# Altium PCB iTOP4412_convertor_4.3Clasics_v1_5.PcbDoc (part 2 of 2)
Units mil, origin at the board's own origin, x right, y up, seen from the top; angles counter-clockwise.
Board outline 4346 x 3286 mil, 2 copper layers (TOP, BOTTOM), stack 10.4 mil thick; 67 components, 78 nets, 328 pads, 290 vias.
Unrouted connection lines stored in the file: 26.
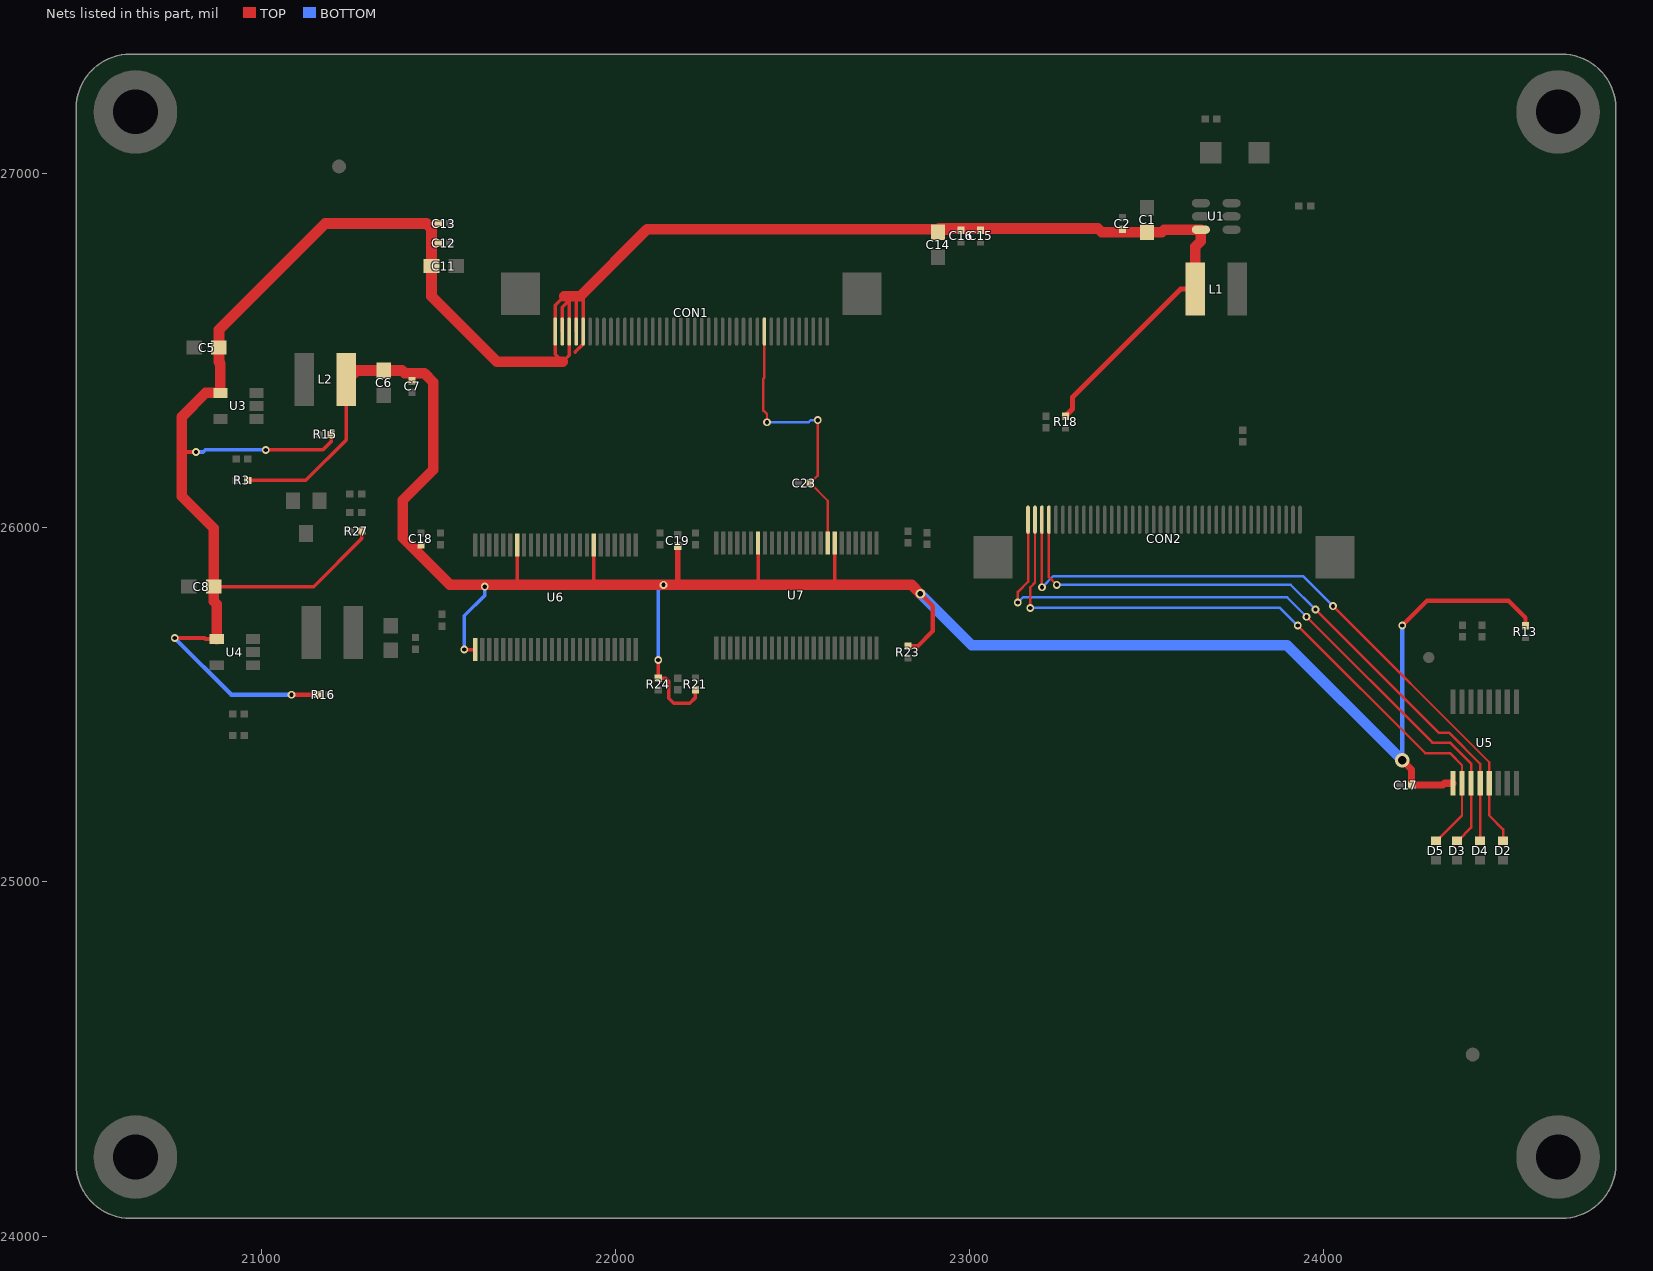
[diagram p2: the nets of this part, all layers, seen from the top]

## Via types
v1: diameter 28, hole 16, TOP to BOTTOM, 182 vias
v2: diameter 22, hole 12, TOP to BOTTOM, 105 vias
v3: diameter 40, hole 24, TOP to BOTTOM, 3 vias

## Nets (pads, with @x,y where several pads share a name; then routed paths per layer and width w, separated by ;. In a path a pad name is that pad's centre, name@x,y a point inside that pad or via, vN(x,y) a via of type N, cw(c..) or ccw(c..) an arc to the next point about the centre after c; other vN are vias at no path point) (continued)
VDD18: C6.2 C7.2 C17.1 C18.1 C19.1 L2.2 R3.1 R13.2 R21.2 R23.2 R24.2 U5.1 U6.1 U6.31 U6.42 U7.31 U7.42 | length 6851.6
  TOP w10: R3.1@20962.58,26133.41 21126.08,26133.41 21240.14,26247.46 L2.2@21240.14,26418.41 ; 21419.08,26435.41 21426.08,26428.41 C7.2@21426.08,26414.91 ; 21439.09,25932.4 21451.08,25944.38 C18.1@21451.08,25951.91 ; v2(21573.44,25655.76) U6.1@21604.7,25655.76 ; v2(21631.08,25833.41) v2@21631.08,25838.41 ; U6.42@21722.81,25951.05 21722.81,25841.68 21726.08,25838.41 ; 21936.08,25838.41 21939.35,25841.68 U6.31@21939.35,25951.05 ; v2(22121.08,25626.41) R24.2@22121.08,25574.91 22142.08,25574.91 22151.08,25565.91 22151.08,25518.41 22165.08,25504.41 22210.08,25504.41 22226.08,25520.41 R21.2@22226.08,25541.91 ; 22396.08,25838.41 22402.81,25845.13 U7.42@22402.81,25956.05 ; 22616.08,25838.41 22619.35,25841.68 U7.31@22619.35,25956.05
  TOP w12: R23.2@22826.08,25664.91 22852.58,25664.91 22896.08,25708.41 22896.08,25778.41 v1(22861.08,25813.41) ; v2(24221.08,25723.41) 24291.08,25793.41 24521.08,25793.41 24569.08,25745.41 R13.2@24569.08,25722.91
  TOP w15: C19.1@22176.08,25946.91 22176.08,25843.41 22181.08,25838.41
  TOP w20: v3(24221.08,25343.41) 24247.58,25316.91 C17.1@24247.58,25273.41 24335.78,25273.41 24340.78,25278.41 U5.1@24364.28,25278.41
  TOP w30: L2.2@21240.14,26418.41 21250.14,26428.41 21256.08,26428.41 21271.08,26443.41 C6.2@21346.08,26443.41 21397.58,26443.41 21405.58,26435.41 21419.08,26435.41 21461.08,26435.41 21486.08,26410.41 21486.08,26163.41 21400.08,26077.41 21400.08,25971.41 21439.09,25932.4 21533.08,25838.41 21631.08,25838.41 21726.08,25838.41 21936.08,25838.41 v2(22136.08,25838.41) 22181.08,25838.41 22396.08,25838.41 22616.08,25838.41 22836.08,25838.41 v1(22861.08,25813.41)
  BOTTOM w10: v2(21573.44,25655.76) 21573.44,25750.76 21631.08,25808.41 v2(21631.08,25833.41) ; v2(22121.08,25626.41) 22121.08,25813.41 22121.23,25813.56 22121.23,25823.56 v2(22136.08,25838.41)
  BOTTOM w12: v3(24221.08,25343.41) v2(24221.08,25723.41)
  BOTTOM w30: v1(22861.08,25813.41) 23006.08,25668.41 23896.08,25668.41 v3(24221.08,25343.41)
VSYS: C1.1 C2.2 C5.2 C8.2 C11.1 C12.1 C13.1 C14.1 C15.1 C16.1 CON1.1 CON1.2 CON1.3 CON1.4 CON1.5 L1.1 R15.2 R16.2 R18.2 R27.1 U1.6 U3.4 U4.4 | length 7444.3
  TOP w10: 20776.08,26208.41 20781.08,26213.41 v2(20816.08,26213.41) ; C8.2@20866.08,25833.41 21148.58,25833.41 21284.58,25969.41 R27.1@21284.58,25990.41 ; v2(21013.08,26219.41) 21174.58,26219.41 21197.58,26242.41 R15.2@21197.58,26263.41 ; 21481.08,26802.41 21482.08,26803.41 C12.1@21499.58,26803.41 ; 21481.08,26844.41 21495.08,26858.41 C13.1@21499.58,26858.41 ; CON1.2@21849.91,26553.41 21849.91,26622.23 21869.59,26641.92 ; 21856.08,26653.41 21830.22,26627.55 CON1.1@21830.22,26553.41 21830.22,26489.26 21851.08,26468.41 21869.59,26486.92 CON1.3@21869.59,26553.41 21869.59,26641.92 ; 21881.08,26653.41 21869.59,26641.92 ; 21887.08,26494.41 21887.08,26496.52 21908.96,26518.41 CON1.5@21908.96,26553.41 21908.96,26645.52 21901.08,26653.41 21889.28,26641.6 CON1.4@21889.28,26553.41 ; C2.2@23431.08,26833.41 C2.2@23431.08,26841.91
  TOP w12: v2(20756.08,25688.41) 20840.08,25688.41 20843.08,25685.41 U4.4@20875.08,25685.41 ; v2(21086.08,25528.41) R16.2@21159.58,25528.41
  TOP w15: C14.1@22911.08,26841.91 C14.1@22911.08,26833.41 22944.58,26833.41 22951.08,26839.91 C16.1@22976.08,26839.91 C15.1@23031.08,26839.91 ; R18.2@23271.08,26314.91 23271.08,26315.41 23290.63,26334.95 23290.63,26368.07 23595.97,26673.41 L1.1@23637.03,26673.41
  TOP w30: U4.4@20875.08,25685.41 20875.08,25783.41 20866.08,25792.41 C8.2@20866.08,25833.41 20866.08,25998.41 20776.08,26088.41 20776.08,26208.41 20776.08,26312.41 20844.08,26380.41 U3.4@20885.08,26380.41 20885.08,26463.41 20881.08,26467.41 C5.2@20881.08,26508.41 20881.08,26558.41 21181.08,26858.41 21467.08,26858.41 21481.08,26844.41 21481.08,26802.41 C11.1@21481.08,26738.41 21481.08,26653.41 21666.08,26468.41 21851.08,26468.41 ; 21856.08,26653.41 21881.08,26653.41 21901.08,26653.41 22089.58,26841.91 22911.08,26841.91 22913.58,26844.41 23361.58,26844.41 23372.58,26833.41 23431.08,26833.41 C1.1@23501.08,26833.41 23542.08,26833.41 23549.68,26841.01 U1.6@23652.78,26841.01 23652.78,26808.19 23637.03,26792.44 L1.1@23637.03,26673.41
  BOTTOM w10: v2(20816.08,26213.41) 20837.08,26213.41 20843.08,26219.41 v2(21013.08,26219.41)
  BOTTOM w12: v2(20756.08,25688.41) 20916.08,25528.41 v2(21086.08,25528.41)
XM: CON2.37 D4.2 U5.4 | length 1814.8
  TOP w7: CON2.37@23223.92,26022.41 23223.92,25860.57 v2(23246.08,25838.41) ; v2(23976.08,25768.91) 24323.58,25421.41 24353.08,25421.41 24441.08,25333.41 U5.4@24441.08,25278.41 D4.2@24441.08,25115.97
  BOTTOM w7: v2(23246.08,25838.41) 23906.58,25838.41 v2(23976.08,25768.91)
XP: CON2.39 D5.2 U5.2 | length 1902.3
  TOP w7: v2(23171.08,25773.41) 23171.08,25831.41 23184.55,25844.88 CON2.39@23184.55,26022.41 ; v2(23926.08,25723.41) 24286.08,25363.41 24355.58,25363.41 24389.88,25329.11 U5.2@24389.88,25278.41 24389.88,25187.8 24318.05,25115.97 D5.2@24316.08,25115.97
  BOTTOM w7: v2(23171.08,25773.41) 23876.08,25773.41 v2(23926.08,25723.41)
XPWMTOUT1: C23.2 CON1.31 U7.32 | length 783.8
  TOP w7: CON1.31@22420.78,26553.41 22420.78,26423.1 22418.08,26420.41 22418.08,26330.4 22428.08,26320.4 v2(22428.08,26297.41) ; C23.2@22549.58,26125.41 C23.2@22550.08,26125.41 ; v2(22571.08,26303.41) 22571.08,26146.41 C23.2@22550.08,26125.41 ; U7.32@22599.66,25956.05 22599.66,26075.83 C23.2@22550.08,26125.41
  BOTTOM w7: v2(22428.08,26297.41) 22545.58,26297.41 22551.58,26303.41 v2(22571.08,26303.41)
YM: CON2.38 D2.2 U5.5 | length 1922.8
  TOP w7: v2(23204.08,25831.41) 23204.08,25850.91 23204.24,25851.06 CON2.38@23204.24,26022.41 ; v2(24026.08,25778.41) 24466.68,25337.81 U5.5@24466.68,25278.41 24466.68,25187.81 24506.08,25148.41 D2.2@24506.08,25115.97
  BOTTOM w7: v2(23204.08,25831.41) 23236.08,25863.41 23941.08,25863.41 v2(24026.08,25778.41)
YP: CON2.40 D3.2 U5.3 | length 1961.5
  TOP w7: v2(23136.08,25788.41) 23136.08,25818.41 23164.87,25847.19 CON2.40@23164.87,26022.41 ; v2(23951.08,25748.41) 24306.08,25393.41 24356.08,25393.41 24415.48,25334 U5.3@24415.48,25278.41 24415.48,25153.4 24378.05,25115.97 D3.2@24376.08,25115.97
  BOTTOM w7: v2(23136.08,25788.41) 23151.08,25803.41 23896.08,25803.41 v2(23951.08,25748.41)
pads on no net: U5.7 U5.8 U5.9 U5.15 U7.2 U7.5 U7.6 U7.8 U7.9 U7.11 U7.12 U7.13 U7.14 U7.16 U7.33 U7.35 U7.36 U7.37 U7.38 U7.40 U7.41 U7.43 U7.44 U7.47

## Polygon pours and split planes (outlines as drawn)
N362187 on TOP "TOP-N362187" (solid, pour order 2): 21 vertices, not listed, extent 21240.08,26041.53 21261.08,26062.9
N362187 on TOP "TOP-N362187 1" (solid, pour order 4): 21 vertices, not listed, extent 21240.08,26073.91 21261.08,26095.28
N362187 on TOP "TOP-N362187 2" (solid, pour order 6): 21 vertices, not listed, extent 21230.09,26084.41 21251.46,26104.41
N362187 on TOP "TOP-N362187 3" (solid, pour order 8): 24 vertices, not listed, extent 21163.71,26052.03 21207.89,26099.28
VDD18 on TOP "TOP-VDD18" (solid, pour order 10): 29 vertices, not listed, extent 21436.08,25929.38 21461.08,25962.41
VDD18 on TOP "TOP-VDD18 1" (solid, pour order 12): 21424.65,26433.19 21416.08,26425.41 21426.08,26413.66 21436.08,26425.41 21427.52,26433.19 21427.1,26433.3 21426.67,26433.37 21426.23,26433.4 21425.79,26433.4 21425.36,26433.35 21424.93,26433.27 21424.65,26433.19
VDD18 on TOP "TOP-VDD18 2" (solid, pour order 14): 18 vertices, not listed, extent 22216.08,25521.41 22236.08,25543.16
VDD18 on TOP "TOP-VDD18 3" (solid, pour order 16): 22177.9,25926.63 22186.08,25936.41 22176.08,25948.78 22166.08,25936.41 22174.26,25926.63 22174.9,25926.5 22175.56,25926.43 22176.21,25926.41 22176.86,25926.45 22177.51,25926.54 22177.9,25926.63
VDD18 on TOP "TOP-VDD18 4" (solid, pour order 18): 21940.17,25912.62 21945.35,25918.55 21939.35,25952.3 21933.35,25918.55 21938.53,25912.62 21938.97,25912.56 21939.4,25912.55 21939.84,25912.57 21940.17,25912.62
VDD18 on TOP "TOP-VDD18 5" (solid, pour order 20): 21723.63,25912.62 21728.81,25918.55 21722.81,25952.3 21716.81,25918.55 21721.99,25912.62 21722.42,25912.56 21722.86,25912.55 21723.29,25912.57 21723.63,25912.62
VDD18 on TOP "TOP-VDD18 6" (solid, pour order 22): 18 vertices, not listed, extent 20961.33,26123.41 20983.08,26143.41
VDD18 on TOP "TOP-VDD18 7" (solid, pour order 24): 23 vertices, not listed, extent 21568.7,25623.69 21605.95,25687.84
VDD18 on TOP "TOP-VDD18 8" (solid, pour order 26): 19 vertices, not listed, extent 22119.83,25564.41 22141.58,25585.41
VDD18 on TOP "TOP-VDD18 9" (solid, pour order 28): 18 vertices, not listed, extent 22111.08,25573.66 22131.08,25595.4
VDD18 on TOP "TOP-VDD18 10" (solid, pour order 30): 17 vertices, not listed, extent 22824.58,25654.41 22846.58,25675.41
VDD18 on TOP "TOP-VDD18 11" (solid, pour order 32): 22403.63,25917.62 22408.81,25923.55 22402.81,25957.3 22396.81,25923.55 22401.99,25917.62 22402.42,25917.56 22402.86,25917.55 22403.29,25917.57 22403.63,25917.62
VDD18 on TOP "TOP-VDD18 12" (solid, pour order 34): 22620.17,25917.62 22625.35,25923.55 22619.35,25957.3 22613.35,25923.55 22618.53,25917.62 22618.97,25917.56 22619.4,25917.55 22619.84,25917.57 22620.17,25917.62
VDD18 on TOP "TOP-VDD18 13" (solid, pour order 36): 24566.85,25742.98 24559.08,25733.41 24569.08,25721.41 24579.08,25733.41 24571.31,25742.98 24570.82,25743.15 24570.31,25743.28 24569.79,25743.36 24569.27,25743.4 24568.75,25743.4 24568.23,25743.34 24567.71,25743.25 24567.21,25743.1 24566.85,25742.98
MD_RSTN on TOP "TOP-MD_RSTN" (solid, pour order 38): 17 vertices, not listed, extent 22318.07,25955.17 22330.07,25994.54
XPWMTOUT1 on TOP "TOP-XPWMTOUT1" (solid, pour order 40): 17 vertices, not listed, extent 22593.66,25955.17 22605.66,25994.54
LCD_HSYNC on TOP "TOP-LCD_HSYNC" (solid, pour order 42): 17 vertices, not listed, extent 22633.03,25955.17 22645.03,25994.54
N338650 on TOP "TOP-N338650" (solid, pour order 44): 23 vertices, not listed, extent 22056.21,25918.98 22093.46,25983.12
N338650 on TOP "TOP-N338650 1" (solid, pour order 46): 19 vertices, not listed, extent 22105.59,25941.41 22127.33,25962.41
LCD_VD5 on TOP "TOP-LCD_VD5" (solid, pour order 48): 17 vertices, not listed, extent 21677.44,25950.17 21689.44,25989.54
N338394 on TOP "TOP-N338394" (solid, pour order 54): 23 vertices, not listed, extent 22248.7,25923.98 22285.95,25988.12
N338394 on TOP "TOP-N338394 1" (solid, pour order 56): 19 vertices, not listed, extent 22224.83,25941.41 22246.58,25962.41
N337628 on TOP "TOP-N337628" (solid, pour order 58): 22805.87,25954.85 22816.08,25946.41 22827.96,25956.91 22816.08,25967.41 22805.87,25958.97 22805.72,25958.33 22805.62,25957.68 22805.58,25957.03 22805.6,25956.38 22805.68,25955.73 22805.81,25955.08 22805.87,25954.85
N338646 on TOP "TOP-N338646" (solid, pour order 60): 23 vertices, not listed, extent 21568.7,25918.98 21605.95,25983.12
N338646 on TOP "TOP-N338646 1" (solid, pour order 62): 19 vertices, not listed, extent 21504.83,25941.41 21526.58,25962.41
LCD_VOTCLK on TOP "TOP-LCD_VOTCLK" (solid, pour order 64): 17 vertices, not listed, extent 22652.72,25955.17 22664.72,25994.54
LCD_VD21 on TOP "TOP-LCD_VD21" (solid, pour order 66): 17 vertices, not listed, extent 21972.72,25950.17 21984.72,25989.54
LCD_VD12 on TOP "TOP-LCD_VD12" (solid, pour order 68): 17 vertices, not listed, extent 21815.24,25950.17 21827.24,25989.54
LCD_VD19 on TOP "TOP-LCD_VD19" (solid, pour order 70): 17 vertices, not listed, extent 21913.66,25950.17 21925.66,25989.54
LCD_VD4 on TOP "TOP-LCD_VD4" (solid, pour order 72): 17 vertices, not listed, extent 21638.07,25950.17 21650.07,25989.54
LCD_VD11 on TOP "TOP-LCD_VD11" (solid, pour order 74): 17 vertices, not listed, extent 21795.55,25950.17 21807.55,25989.54
N337734 on TOP "TOP-N337734" (solid, pour order 78): 22285.52,25622.33 22290.7,25628.26 22284.7,25662.01 22278.7,25628.26 22283.88,25622.33 22284.31,25622.28 22284.75,25622.27 22285.18,25622.29 22285.52,25622.33
LCD_VD20 on TOP "TOP-LCD_VD20" (solid, pour order 80): 17 vertices, not listed, extent 21953.03,25950.17 21965.03,25989.54
LCD_VD15 on TOP "TOP-LCD_VD15" (solid, pour order 82): 17 vertices, not listed, extent 21893.98,25950.17 21905.98,25989.54
LCD_VD22 on TOP "TOP-LCD_VD22" (solid, pour order 84): 17 vertices, not listed, extent 22012.09,25950.17 22024.09,25989.54
LCD_VD3 on TOP "TOP-LCD_VD3" (solid, pour order 86): 17 vertices, not listed, extent 21618.39,25950.17 21630.39,25989.54
LCD_VD10 on TOP "TOP-LCD_VD10" (solid, pour order 88): 17 vertices, not listed, extent 21756.18,25950.17 21768.18,25989.54
LCD_VD6 on TOP "TOP-LCD_VD6" (solid, pour order 90): 17 vertices, not listed, extent 21697.13,25950.17 21709.13,25989.54
N337730 on TOP "TOP-N337730" (solid, pour order 94): 17 vertices, not listed, extent 22805.59,25621.41 22827.58,25642.41
LCD_VD23 on TOP "TOP-LCD_VD23" (solid, pour order 96): 17 vertices, not listed, extent 22031.77,25950.17 22043.77,25989.54
LCD_VD14 on TOP "TOP-LCD_VD14" (solid, pour order 98): 17 vertices, not listed, extent 21854.61,25950.17 21866.61,25989.54
LCD_VD13 on TOP "TOP-LCD_VD13" (solid, pour order 100): 17 vertices, not listed, extent 21834.92,25950.17 21846.92,25989.54
N338218 on TOP "TOP-N338218" (solid, pour order 104): 19 vertices, not listed, extent 22100.59,25531.41 22122.33,25552.41
N338218 on TOP "TOP-N338218 1" (solid, pour order 106): 22058.28,25617.33 22063.46,25623.26 22057.46,25657.01 22051.46,25623.26 22056.64,25617.33 22057.08,25617.28 22057.51,25617.27 22057.95,25617.29 22058.28,25617.33
LCD_VD7 on TOP "TOP-LCD_VD7" (solid, pour order 108): 17 vertices, not listed, extent 21736.5,25950.17 21748.5,25989.54
LCD_DEN on TOP "TOP-LCD_DEN" (solid, pour order 110): 17 vertices, not listed, extent 22711.77,25955.17 22723.77,25994.54
LCD_VSYNC on TOP "TOP-LCD_VSYNC" (solid, pour order 112): 17 vertices, not listed, extent 22692.09,25955.17 22704.09,25994.54
CAM5M_RST on TOP "TOP-CAM5M_RST" (solid, pour order 114): 21 vertices, not listed, extent 21282.71,26032.41 21304.08,26052.41
N334265 on TOP "TOP-N334265" (solid, pour order 116): 21 vertices, not listed, extent 23261.08,26261.41 23281.08,26282.78
N332264 on TOP "TOP-N332264" (solid, pour order 118): 21 vertices, not listed, extent 23761.08,26221.41 23781.08,26242.78
N322804 on TOP "TOP-N322804" (solid, pour order 120): 21 vertices, not listed, extent 20855.08,25577.41 20895.08,25612.91
N322804 on TOP "TOP-N322804 1" (solid, pour order 122): 17 vertices, not listed, extent 20909.08,25411.91 20930.08,25433.9
N322804 on TOP "TOP-N322804 2" (solid, pour order 124): 17 vertices, not listed, extent 20909.08,25452.91 20930.08,25474.91
N322804 on TOP "TOP-N322804 3" (solid, pour order 126): 17 vertices, not listed, extent 20909.08,25471.91 20930.08,25493.9
N321888 on TOP "TOP-N321888" (solid, pour order 128): 19 vertices, not listed, extent 20919.08,26132.16 20940.08,26153.9
N321888 on TOP "TOP-N321888 1" (solid, pour order 130): 19 vertices, not listed, extent 20919.08,26172.91 20940.08,26194.66
N321888 on TOP "TOP-N321888 2" (solid, pour order 132): 19 vertices, not listed, extent 20919.08,26192.16 20940.08,26213.9
XM on TOP "TOP-XM" (solid, pour order 134): 22 vertices, not listed, extent 24427.11,25115.09 24455.06,25141.95
XM on TOP "TOP-XM 1" (solid, pour order 136): 19 vertices, not listed, extent 24433.58,25235.91 24448.58,25279.28
XM on TOP "TOP-XM 2" (solid, pour order 138): 19 vertices, not listed, extent 24433.58,25277.53 24448.58,25320.9
YP on TOP "TOP-YP" (solid, pour order 140): 19 vertices, not listed, extent 24407.98,25235.91 24422.98,25279.28
YP on TOP "TOP-YP 1" (solid, pour order 142): 19 vertices, not listed, extent 24407.98,25277.53 24422.98,25320.9
YM on TOP "TOP-YM" (solid, pour order 144): 22 vertices, not listed, extent 24492.11,25115.09 24520.06,25141.95
YM on TOP "TOP-YM 1" (solid, pour order 146): 19 vertices, not listed, extent 24459.18,25235.91 24474.18,25279.28
YM on TOP "TOP-YM 2" (solid, pour order 148): 19 vertices, not listed, extent 24459.18,25277.53 24474.18,25320.9
N02294 on TOP "TOP-N02294" (solid, pour order 150): 21 vertices, not listed, extent 24436.08,25671.41 24456.08,25692.78
N02294 on TOP "TOP-N02294 1" (solid, pour order 152): 19 vertices, not listed, extent 24433.58,25507.53 24448.58,25550.9
N02298 on TOP "TOP-N02298" (solid, pour order 154): 21 vertices, not listed, extent 24381.08,25671.41 24401.08,25692.78
N02298 on TOP "TOP-N02298 1" (solid, pour order 156): 19 vertices, not listed, extent 24407.98,25507.53 24422.98,25550.9
XP on TOP "TOP-XP" (solid, pour order 158): 19 vertices, not listed, extent 24382.38,25235.91 24397.38,25279.28
XP on TOP "TOP-XP 1" (solid, pour order 160): 19 vertices, not listed, extent 24382.38,25277.53 24397.38,25320.9
TP_EN on TOP "TOP-TP_EN" (solid, pour order 162): 21150.51,25950.34 21160.31,25940.55 21168.87,25945.02 21160.67,25952.82 21152.99,25952.82 21150.51,25950.34
TP_EN on TOP "TOP-TP_EN 1" (solid, pour order 164): 21 vertices, not listed, extent 21231.09,25980.41 21252.46,26000.41
TP_EN on TOP "TOP-TP_EN 2" (solid, pour order 166): 21 vertices, not listed, extent 21125.71,25968.71 21159.27,25997.61
TP_EN on TOP "TOP-TP_EN 3" (solid, pour order 168): 18 vertices, not listed, extent 20967.13,25588.91 20987.03,25612.28
TP_EN on TOP "TOP-TP_EN 4" (solid, pour order 170): 21 vertices, not listed, extent 20976.21,25597.41 21010.08,25625.41
TP_EN on TOP "TOP-TP_EN 5" (solid, pour order 172): 21 vertices, not listed, extent 21182.08,25527.53 21203.08,25548.9
TP_EN on TOP "TOP-TP_EN 6" (solid, pour order 174): 22 vertices, not listed, extent 20986.21,26292.41 21021.08,26320.41
LED+ on TOP "TOP-LED+" (solid, pour order 176): 21 vertices, not listed, extent 23650.59,27055.91 23710.59,27118.4
LED+ on TOP "TOP-LED+ 1" (solid, pour order 178): 21 vertices, not listed, extent 23621.09,27028.41 23683.09,27088.41
N323503 on TOP "TOP-N323503" (solid, pour order 180): 35 vertices, not listed, extent 23725.01,26825.91 23774.36,26849.36
N323503 on TOP "TOP-N323503 1" (solid, pour order 182): 22 vertices, not listed, extent 23814.69,27028.41 23876.56,27088.41
BUF_MD_RSTN on TOP "TOP-BUF_MD_RSTN" (solid, pour order 184): 17 vertices, not listed, extent 22318.07,25622.27 22330.07,25661.64
BUF_LCD_VD11 on TOP "TOP-BUF_LCD_VD11" (solid, pour order 186): 17 vertices, not listed, extent 21795.55,25617.27 21807.55,25656.64
BUF_LCD_VD13 on TOP "TOP-BUF_LCD_VD13" (solid, pour order 188): 17 vertices, not listed, extent 21834.92,25617.27 21846.92,25656.64
BUF_LCD_VD7 on TOP "TOP-BUF_LCD_VD7" (solid, pour order 190): 17 vertices, not listed, extent 21736.5,25617.27 21748.5,25656.64
BUF_LCD_VSYNC on TOP "TOP-BUF_LCD_VSYNC" (solid, pour order 192): 17 vertices, not listed, extent 22692.09,25622.27 22704.09,25661.64
BUF_LCD_VD23 on TOP "TOP-BUF_LCD_VD23" (solid, pour order 194): 17 vertices, not listed, extent 22031.77,25617.27 22043.77,25656.64
BUF_LCD_VOTCLK on TOP "TOP-BUF_LCD_VOTCLK" (solid, pour order 196): 17 vertices, not listed, extent 22652.72,25622.27 22664.72,25661.64
BUF_LCD_VD5 on TOP "TOP-BUF_LCD_VD5" (solid, pour order 198): 17 vertices, not listed, extent 21677.44,25617.27 21689.44,25656.64
BUF_LCD_VD3 on TOP "TOP-BUF_LCD_VD3" (solid, pour order 200): 17 vertices, not listed, extent 21618.39,25617.27 21630.39,25656.64
BUF_LCD_VD3 on TOP "TOP-BUF_LCD_VD3 1" (solid, pour order 202): 26 vertices, not listed, extent 23478.95,25951.03 23493.22,25975.78
BUF_LCD_VD20 on TOP "TOP-BUF_LCD_VD20" (solid, pour order 204): 17 vertices, not listed, extent 21953.03,25617.27 21965.03,25656.64
BUF_LCD_VD12 on TOP "TOP-BUF_LCD_VD12" (solid, pour order 206): 23164.47,25320.41 23175.08,25320.41 23181.9,25326.7 23173.3,25334.18 23162,25322.88 23164.47,25320.41
BUF_LCD_VD12 on TOP "TOP-BUF_LCD_VD12 1" (solid, pour order 208): 17 vertices, not listed, extent 21815.24,25617.27 21827.24,25656.64
BUF_LCD_VD14 on TOP "TOP-BUF_LCD_VD14" (solid, pour order 210): 17 vertices, not listed, extent 21854.61,25617.27 21866.61,25656.64
BUF_LCD_VD21 on TOP "TOP-BUF_LCD_VD21" (solid, pour order 212): 17 vertices, not listed, extent 21972.72,25617.27 21984.72,25656.64
BUF_LCD_HSYNC on TOP "TOP-BUF_LCD_HSYNC" (solid, pour order 214): 17 vertices, not listed, extent 22633.03,25622.27 22645.03,25661.64
BUF_LCD_VD4 on TOP "TOP-BUF_LCD_VD4" (solid, pour order 216): 17 vertices, not listed, extent 21638.07,25617.27 21650.07,25656.64
BUF_LCD_DEN on TOP "TOP-BUF_LCD_DEN" (solid, pour order 218): 17 vertices, not listed, extent 22711.77,25622.27 22723.77,25661.64
BUF_LCD_VD15 on TOP "TOP-BUF_LCD_VD15" (solid, pour order 220): 17 vertices, not listed, extent 21893.98,25617.27 21905.98,25656.64
BUF_LCD_VD22 on TOP "TOP-BUF_LCD_VD22" (solid, pour order 222): 17 vertices, not listed, extent 22012.09,25617.27 22024.09,25656.64
BUF_LCD_VD6 on TOP "TOP-BUF_LCD_VD6" (solid, pour order 224): 17 vertices, not listed, extent 21697.13,25617.27 21709.13,25656.64
BUF_LCD_VD10 on TOP "TOP-BUF_LCD_VD10" (solid, pour order 226): 17 vertices, not listed, extent 21756.18,25617.27 21768.18,25656.64
BUF_LCD_VD19 on TOP "TOP-BUF_LCD_VD19" (solid, pour order 228): 32 vertices, not listed, extent 23048.47,25396.17 23066.93,25412.68
BUF_LCD_VD19 on TOP "TOP-BUF_LCD_VD19 1" (solid, pour order 230): 17 vertices, not listed, extent 21913.66,25617.27 21925.66,25656.64
BUF_LCD_VD19 on TOP "TOP-BUF_LCD_VD19 2" (solid, pour order 232): 26 vertices, not listed, extent 23793.91,25952.03 23808.19,25976.78
DC33V on TOP "TOP-DC33V" (solid, pour order 234): 21490.87,25752.85 21501.08,25744.41 21512.96,25754.91 21501.08,25765.41 21490.87,25756.97 21490.72,25756.33 21490.62,25755.68 21490.58,25755.03 21490.6,25754.38 21490.68,25753.73 21490.81,25753.08 21490.87,25752.85
DC33V on TOP "TOP-DC33V 1" (solid, pour order 236): 22174.26,25595.18 22166.08,25585.41 22176.08,25573.03 22186.08,25585.41 22177.9,25595.18 22177.26,25595.31 22176.61,25595.39 22175.95,25595.4 22175.3,25595.36 22174.65,25595.27 22174.26,25595.18
DC33V on TOP "TOP-DC33V 2" (solid, pour order 238): 22618.53,25699.19 22613.35,25693.26 22619.35,25659.51 22625.35,25693.26 22620.17,25699.19 22620.17,25699.2 22619.74,25699.25 22619.31,25699.26 22618.87,25699.24 22618.53,25699.19
DC33V on TOP "TOP-DC33V 3" (solid, pour order 240): 22401.99,25699.19 22396.81,25693.26 22402.81,25659.51 22408.81,25693.26 22403.63,25699.19 22403.63,25699.2 22403.2,25699.25 22402.76,25699.26 22402.33,25699.24 22401.99,25699.19
DC33V on TOP "TOP-DC33V 4" (solid, pour order 242): 21938.53,25694.19 21933.35,25688.26 21939.35,25654.51 21945.35,25688.26 21940.17,25694.19 21940.17,25694.2 21939.74,25694.25 21939.31,25694.26 21938.87,25694.24 21938.53,25694.19
DC33V on TOP "TOP-DC33V 5" (solid, pour order 244): 21721.99,25694.19 21716.81,25688.26 21722.81,25654.51 21728.81,25688.26 21723.63,25694.19 21723.63,25694.2 21723.2,25694.25 21722.76,25694.26 21722.33,25694.24 21721.99,25694.19
DC33V on TOP "TOP-DC33V 6" (solid, pour order 246): 20972.65,25415.63 20963.08,25423.41 20951.08,25413.41 20963.08,25403.41 20972.65,25411.18 20972.83,25411.67 20972.95,25412.18 20973.04,25412.7 20973.08,25413.22 20973.07,25413.74 20973.02,25414.26 20972.92,25414.78 20972.78,25415.28 20972.65,25415.63
BUF_XPWMTOUT1 on TOP "TOP-BUF_XPWMTOUT1" (solid, pour order 248): 26 vertices, not listed, extent 22866.08,25938.91 22890.08,25963.41
BUF_XPWMTOUT1 on TOP "TOP-BUF_XPWMTOUT1 1" (solid, pour order 250): 34 vertices, not listed, extent 22587.31,25703.72 22603.88,25723.24
BUF_XPWMTOUT1 on TOP "TOP-BUF_XPWMTOUT1 2" (solid, pour order 252): 17 vertices, not listed, extent 22593.66,25659.89 22605.66,25699.26
VSYS on TOP "TOP-VSYS" (solid, pour order 254): 18 vertices, not listed, extent 21479.08,26793.41 21500.83,26813.41
VSYS on TOP "TOP-VSYS 1" (solid, pour order 256): 28 vertices, not listed, extent 21480.08,26843.41 21510.08,26868.41
VSYS on TOP "TOP-VSYS 2" (solid, pour order 258): 20 vertices, not listed, extent 22909.21,26811.41 22952.08,26855.41
VSYS on TOP "TOP-VSYS 3" (solid, pour order 260): 19 vertices, not listed, extent 20841.08,25671.41 20876.58,25699.41
VSYS on TOP "TOP-VSYS 4" (solid, pour order 262): 22 vertices, not listed, extent 20864.83,25813.41 20908.08,25853.41
VSYS on TOP "TOP-VSYS 5" (solid, pour order 264): 19 vertices, not listed, extent 21187.08,26242.91 21208.08,26264.66
VSYS on TOP "TOP-VSYS 6" (solid, pour order 266): 21139.51,25526.18 21149.08,25518.41 21161.08,25528.41 21149.08,25538.41 21139.51,25530.63 21139.34,25530.14 21139.21,25529.63 21139.13,25529.12 21139.09,25528.59 21139.09,25528.07 21139.14,25527.55 21139.24,25527.04 21139.38,25526.53 21139.51,25526.18
VSYS on TOP "TOP-VSYS 7" (solid, pour order 268): 22996.29,26841.97 22986.08,26850.41 22974.21,26839.91 22986.08,26829.41 22996.29,26837.85 22996.44,26838.48 22996.54,26839.13 22996.58,26839.78 22996.56,26840.44 22996.49,26841.09 22996.36,26841.73 22996.29,26841.97
VSYS on TOP "TOP-VSYS 8" (solid, pour order 270): 22955.87,26837.85 22966.08,26829.41 22977.96,26839.91 22966.08,26850.41 22955.87,26841.97 22955.72,26841.33 22955.62,26840.68 22955.58,26840.03 22955.6,26839.38 22955.68,26838.73 22955.81,26838.08 22955.87,26837.85
VSYS on TOP "TOP-VSYS 9" (solid, pour order 272): 23010.87,26837.85 23021.08,26829.41 23032.96,26839.91 23021.08,26850.41 23010.87,26841.97 23010.72,26841.33 23010.62,26840.68 23010.58,26840.03 23010.6,26839.38 23010.68,26838.73 23010.81,26838.08 23010.87,26837.85
VSYS on TOP "TOP-VSYS 10" (solid, pour order 274): 19 vertices, not listed, extent 21274.08,25969.91 21295.08,25991.66
VSYS on TOP "TOP-VSYS 11" (solid, pour order 276): 21826.08,26599.41 21826.08,26670.59 21901.08,26670.59 21901.08,26599.41 21826.08,26599.41
VSYS on TOP "TOP-VSYS 12" (solid, pour order 278): 21826.08,26451.24 21826.08,26507.4 21901.08,26507.4 21901.08,26451.24 21826.08,26451.24
GND on TOP "TOP-GND" (solid, pour order 282): 82 vertices, not listed, extent 20501.08,24073.41 24801.08,27313.4
GND on TOP "TOP-GND 1" (solid, pour order 284): 63 vertices, not listed, extent 22646.58,25994.55 22682.58,26236.44
GND on TOP "TOP-GND 2" (solid, pour order 286): 85 vertices, not listed, extent 21820.66,25989.55 21884.48,26241.15
GND on TOP "TOP-GND 3" (solid, pour order 288): 732 vertices, not listed, extent 21956.36,25865.41 22484.01,26347.53
GND on TOP "TOP-GND 4" (solid, pour order 290): 39 vertices, not listed, extent 21485.93,25865.41 21705.81,25934.05
GND on TOP "TOP-GND 5" (solid, pour order 292): 777 vertices, not listed, extent 21925.97,25593.91 23615.19,26817.4
GND on TOP "TOP-GND 6" (solid, pour order 294): 33 vertices, not listed, extent 22433.58,26391.18 22444.64,26501.4
GND on TOP "TOP-GND 7" (solid, pour order 296): 31 vertices, not listed, extent 22377.22,26300.39 22385.59,26501.4
GND on TOP "TOP-GND 8" (solid, pour order 298): 37 vertices, not listed, extent 22337.85,26265.02 22346.22,26501.4
GND on TOP "TOP-GND 9" (solid, pour order 300): 33 vertices, not listed, extent 21013.08,26259.41 21223.13,26391.4
GND on TOP "TOP-GND 10" (solid, pour order 302): 629 vertices, not listed, extent 23278.79,26074.41 24099.08,27126.4
GND on TOP "TOP-GND 11" (solid, pour order 304): 36 vertices, not listed, extent 21994.23,25989.55 22002.59,26222.68
GND on TOP "TOP-GND 12" (solid, pour order 306): 40 vertices, not listed, extent 21777.68,25989.55 21786.05,26133.02
GND on TOP "TOP-GND 13" (solid, pour order 308): 22419.81,25865.41 22419.81,25911.55 22581.66,25911.55 22602.35,25911.55 22602.35,25865.41 22419.81,25865.41
GND on TOP "TOP-GND 14" (solid, pour order 310): 21739.81,25865.41 21739.81,25906.55 21922.35,25906.55 21922.35,25865.41 21739.81,25865.41
GND on TOP "TOP-GND 15" (solid, pour order 312): 61 vertices, not listed, extent 22419.81,25705.26 22575.49,25731.4
GND on TOP "TOP-GND 16" (solid, pour order 314): 21739.81,25700.27 21739.81,25732.85 21742.01,25733.71 21744.12,25734.76 21746.13,25735.98 21748.02,25737.38 21749.79,25738.94 21750.27,25739.4 21922.35,25739.4 21922.35,25700.27 21739.81,25700.27
GND on TOP "TOP-GND 17" (solid, pour order 316): 50 vertices, not listed, extent 22636.36,25649.91 22878.08,25737.16
GND on TOP "TOP-GND 18" (solid, pour order 318): 73 vertices, not listed, extent 23676.58,25571.52 23700.54,25940.12
GND on TOP "TOP-GND 19" (solid, pour order 320): 102 vertices, not listed, extent 21956.36,25558.91 22156.58,25737.4
GND on TOP "TOP-GND 20" (solid, pour order 322): 45 vertices, not listed, extent 22339.57,25523.91 22683,25622.26
GND on TOP "TOP-GND 21" (solid, pour order 324): 22 vertices, not listed, extent 22192.08,25521.41 22385.81,25731.4
GND on TOP "TOP-GND 22" (solid, pour order 326): 70 vertices, not listed, extent 22234.78,25499.41 22340.5,25616.26
GND on TOP "TOP-GND 23" (solid, pour order 328): 408 vertices, not listed, extent 22971.07,25287.88 23385.58,25709.82
I2C_SCL7 on TOP "TOP-I2C_SCL7" (solid, pour order 330): 19 vertices, not listed, extent 24459.18,25507.53 24474.18,25550.9
I2C_SDA7 on TOP "TOP-I2C_SDA7" (solid, pour order 332): 19 vertices, not listed, extent 24484.78,25507.53 24499.78,25550.9
GPX0_0 on TOP "TOP-GPX0_0" (solid, pour order 334): 19 vertices, not listed, extent 24510.38,25507.53 24525.38,25550.9
GPX0_0 on TOP "TOP-GPX0_0 1" (solid, pour order 336): 21 vertices, not listed, extent 24568.21,25679.41 24589.58,25700.41
LCD_VD5 on BOTTOM "BOTTOM-LCD_VD5" (solid, pour order 50): 31 vertices, not listed, extent 21630.22,26080.31 21647.69,26096.68
LCD_VD5 on BOTTOM "BOTTOM-LCD_VD5 1" (solid, pour order 52): 31 vertices, not listed, extent 22190.35,26080.42 22207.94,26096.81
LCD_VD11 on BOTTOM "BOTTOM-LCD_VD11" (solid, pour order 76): 30 vertices, not listed, extent 22137.97,26164.92 22154.95,26181.18
LCD_VD6 on BOTTOM "BOTTOM-LCD_VD6" (solid, pour order 92): 21675.16,26105.88 21663.86,26117.18 21655.26,26109.7 21662.08,26103.41 21672.69,26103.41 21675.16,26105.88
LCD_VD13 on BOTTOM "BOTTOM-LCD_VD13" (solid, pour order 102): 34 vertices, not listed, extent 22087.18,26204.84 22106.85,26221.41
GND on BOTTOM "BOTTOM-GND" (solid, pour order 280): 82 vertices, not listed, extent 20501.08,24073.41 24801.08,27313.4
no net on PLACE_BOUND_TOP (solid): 21259.45,27019.41 ccw(c21220.08,27019.41) 21220.08,27058.78 ccw(c21220.08,27019.41) 21180.71,27019.41 ccw(c21220.08,27019.41) 21220.08,26980.04 ccw(c21220.08,27019.41) 21259.45,27019.41
no net on PLACE_BOUND_TOP (solid): 24459.45,24512.41 ccw(c24420.08,24512.41) 24420.08,24551.78 ccw(c24420.08,24512.41) 24380.71,24512.41 ccw(c24420.08,24512.41) 24420.08,24473.04 ccw(c24420.08,24512.41) 24459.45,24512.41

## Keep-outs
TOP:
  circle w1: c21220.08,27019.41 r39.37
  circle w1: c24420.08,24512.41 r39.37
  circle w1: c21220.08,27019.41 r39.37
  circle w1: c24420.08,24512.41 r39.37
Multi-Layer:
  region: 24401.08,24293.41 24401.08,24288.41 24400.82,24282.31 24400.02,24276.25 24398.7,24270.29 24396.86,24264.46 24394.52,24258.82 24391.7,24253.41 24388.42,24248.26 24384.71,24243.41 24380.58,24238.91 24376.08,24234.78 24371.23,24231.07 24366.08,24227.78 24360.67,24224.96 24355.02,24222.63 24349.2,24220.79 24343.24,24219.47 24337.18,24218.67 24331.08,24218.41 21931.08,24218.41 21924.98,24218.67 21918.93,24219.47 21912.96,24220.79 21907.14,24222.63 21901.5,24224.96 21896.08,24227.78 21890.93,24231.07 21886.09,24234.78 21881.58,24238.91 21877.46,24243.41 21873.74,24248.26 21870.46,24253.41 21867.64,24258.82 21865.3,24264.46 21863.47,24270.29 21862.15,24276.25 21861.35,24282.31 21861.08,24288.41 21861.08,24293.41 21861.35,24299.51 21862.15,24305.56 21863.47,24311.52 21865.3,24317.35 21867.64,24322.99 21870.46,24328.41 21873.74,24333.56 21877.46,24338.4 21881.58,24342.9 21886.09,24347.03 21890.93,24350.75 21896.08,24354.03 21901.5,24356.85 21907.14,24359.18 21912.96,24361.02 21918.93,24362.34 21924.98,24363.14 21931.08,24363.41 24331.08,24363.41 24337.18,24363.14 24343.24,24362.34 24349.2,24361.02 24355.02,24359.18 24360.67,24356.85 24366.08,24354.03 24371.23,24350.75 24376.08,24347.03 24380.58,24342.9 24384.71,24338.4 24388.42,24333.56 24391.7,24328.41 24394.52,24322.99 24396.86,24317.35 24398.7,24311.52 24400.02,24305.56 24400.82,24299.51 24401.08,24293.41

## Other copper
TOP:
  drawing of 52 lines, arcs and shapes, not listed
BOTTOM:
  drawing of 27 lines, arcs and shapes, not listed

## Silkscreen, mask and mechanical layers (free items; w line width, h text height)
Top Overlay:
  drawing of 1633 lines, arcs and shapes, not listed
  text "R4.3V1_5" at 20758.67,26776.74 h50
NCLEGEND-1-2:
  circle w1: c27474.38,21171.57 r25
  lines w1: 27025,20750.1 31859.7,20750.1 ; 27025,21031.08 31859.7,21031.08 ; 27025,21312.06 31859.7,21312.06 ; 27025,21593.04 31859.7,21593.04 ; 27025,21874.02 31859.7,21874.02 ; 27025,22155 31859.7,22155 ; 27468.38,21452.55 27480.38,21452.55 ; 27474.38,21446.55 27474.38,21458.55 ; 27923.76,20469.12 27923.76,21874.02 ; 29814.26,20469.12 29814.26,21874.02 ; 31084.92,20469.12 31084.92,21874.02 ; 27025,20469.12 31859.7,20469.12 31859.7,22405 27025,22405 27025,20469.12 ; 27411.38,20578.11 27411.38,20641.11 27474.38,20672.61 27537.38,20641.11 27537.38,20578.11 27474.38,20546.61 27411.38,20578.11 ; 27462.38,20890.59 27468.38,20902.59 27480.38,20902.59 27486.38,20890.59 27480.38,20878.59 27468.38,20878.59 27462.38,20890.59
  text "DRILL CHART: TOP to BOTTOM" at 28142.35,22217.5 h125
  text "ALL UNITS ARE IN MILS" at 28392.35,21967.5 h125
  text "FIGURE" at 27174.38,21686.52 h125
  text "SIZE" at 28669.01,21686.52 h125
  text "PLATED" at 30149.59,21686.52 h125
  text "QTY" at 31322.31,21686.52 h125
  text "12.0" at 28669.01,21390.05 h125
  text "PLATED" at 30149.59,21390.05 h125
  text "105" at 31322.31,21390.05 h125
  text "16.0" at 28669.01,21109.07 h125
  text "PLATED" at 30149.59,21109.07 h125
  text "182" at 31322.31,21109.07 h125
  text "24.0" at 28669.01,20828.09 h125
  text "PLATED" at 30149.59,20828.09 h125
  text "3" at 31422.31,20828.09 h125
  text "126.0" at 28619.01,20547.11 h125
  text "PLATED" at 30149.59,20547.11 h125
  text "4" at 31422.31,20547.11 h125
OUTLINE:
  lines w6: 20481.08,24203.41 ccw(c20631.08,24203.41) 20631.08,24053.41 24671.08,24053.41 ccw(c24671.08,24203.41) 24821.08,24203.41 24821.08,27183.41 ccw(c24671.08,27183.41) 24671.08,27333.41 20631.08,27333.41 ccw(c20631.08,27183.41) 20481.08,27183.41 20481.08,24203.41 ; 21881.08,24288.41 ccw(c21931.08,24288.41) 21931.08,24238.41 24331.08,24238.41 ccw(c24331.08,24288.41) 24381.08,24288.41 24381.08,24293.41 ccw(c24331.08,24293.41) 24331.08,24343.41 21931.08,24343.41 ccw(c21931.08,24293.41) 21881.08,24293.41 21881.08,24288.41
DIMENSION:
  lines w2: 22522.85,17770.89 24067.85,17770.89 ; 22522.85,17875.89 24067.85,17875.89 ; 22522.85,17980.89 24067.85,17980.89 ; 22522.85,18075.89 24067.85,18075.89 ; 22522.85,18360.89 24067.85,18360.89 ; 22522.85,18440.89 24067.85,18440.89 ; 22522.85,18540.89 24067.85,18540.89 ; 22522.85,18645.89 24067.85,18645.89 ; 23087.85,17685.89 23087.85,18075.89 ; 23552.85,18360.89 23552.85,18720.89 ; 22522.85,17685.89 22522.85,18710.89 22522.85,18720.89 24067.85,18720.89 24067.85,17690.89 24062.85,17685.89 22522.85,17685.89
  lines w6: 22475,17301 24300,17301 ; 22475,17376 24300,17376 ; 22475,17451 24300,17451 24300,17476 ; 22653,15642 22663,15642 23909,15642 ; 22653,15717 23908,15717 ; 22653,15792 23908,15792 ; 22653,15877 23909,15880 ; 22653,15952 22653,15955 23909,15955 ; 22655.5,15267 23908,15267 23909,15267 ; 22655.5,15342 23908,15342 ; 22655.5,15417 23908,15417 ; 22655.5,15492 23908,15492 ; 22655.5,15567 23908,15567 ; 22658,15267 22653,15267 ; 22659,16030 23909,16030 ; 22659,16130 23909,16130 ; 22659,16205 23909,16205 23909,15267 ; 22660,15042 23906,15042 ; 22660,15117 23906,15117 ; 22660,15192 23906,15192 ; 22684,16205 22653,16205 22653,15267 ; 22725,17226 22725,17451 ; 23034,16130 23059,16130 23059,15642 23058,15642 23058,15117 ; 23057,14594 23058,14595 23058,14742 ; 23057,14741 23058,14742 ; 23059,14815 23058,14816 ; 23083,15117 23058,15117 ; 23125,17226 23125,17451 ; 23558,14595 23558,14743 ; 23559,14742 23558,14743 ; 23584,16130 23559,16130 23559,15642 ; 23650,17226 23650,17451 ; 23906,14892 22653,14892 ; 23906,14967 22653,14967 ; 23906,15267 23909,15267 ; 23975,17226 23975,17451 24000,17451 ; 22653,14668 22653,14743 ; 22653,14668 23906,14668 23908,14670 ; 22653,14668 22653,14594 23907,14594 23908,14595 23908,14670 ; 22653,14743 22653,14817 ; 22653,14743 22654,14742 23908,14742 ; 22653,14817 22653,14892 ; 22653,14817 23908,14817 ; 22653,14892 22653,14967 ; 22653,14967 22653,15267 ; 23058,14742 23058,14816 ; 23058,14816 23058,15117 ; 23558,14743 23558,15642 ; 23558,15642 23559,15642 ; 23558,15642 23559,15642 ; 23908,14670 23908,14742 ; 23908,14742 23908,14817 ; 23908,14817 23908,14967 ; 23908,14967 23909,14967 ; 23908,14967 23909,14967 ; 23909,14967 23909,15267 ; 22475,17226 24300,17226 24300,17526 22625,17526 22475,17526 22475,17226
  text "ITOP4412_CONVERTOR_4.3Clasics_v1_5" at 22526.85,18671.89 h30
  text "LAYERS:2" at 23626.85,18671.89 h30
  text "BOARD THICKNESS :" at 22526.85,18571.89 h30
  text "1.6mm" at 23076.85,18571.89 h30
  text "UNITS: mil" at 23626.85,18571.89 h30
  text "DIELECTRIC MATERIAL: FR-4" at 22526.85,18471.89 h30
  text "PCB  SURFACE FINISHES:  [2]" at 22522.85,18380.89 h30
  text "1.HASL" at 22519,18312 h30
  text "2.ENIG" at 22519,18262 h30
  text "3.OSP" at 22516.85,18211.89 h30
  text "4.IMMERSION TIN" at 22516.85,18161.89 h30
  text "5.GOLD FINGERS;OTHERS" at 22516.85,18111.89 h30
  text "SPELL MODE: NO" at 22526.85,18011.89 h30
  text "OPEN WINDOWS:" at 23226.85,18011.89 h30
  text "SHORT NETS: NO" at 22526.85,17911.89 h30
  text "TEL:010" at 23226.85,17911.89 h30
  text "DESIGNER:Tyh" at 22526.85,17811.89 h30
  text "DATE:2015-08-04" at 23226.85,17811.89 h30
  text "E-MAIL:" at 22526.85,17711.89 h30
  text "DIFFERENTIAL IMPEDANCE      LIST" at 22853,17482 h30
  text "WIDTH/SPACE" at 22748,17397 h30
  text "IMPEDANCE(OHM)" at 23193,17397 h30
  text "PRECISION" at 23668,17397 h30
  text "FREQUENGY" at 24018,17397 h30
  text "LAYER" at 22518,17392 h30
  text "REFERENCE    STACK UP" at 22983,16142 h30
  text "MATERIAL" at 22734,16055 h30
  text "LAYER NAME" at 23159,16055 h30
  text "THICKNESS" at 23584,16055 h30
  text "COPPER" at 22733,15967 h30
  text "ART01" at 23083,15967 h30
  text "2.1MIL" at 23583,15967 h30
  text "1--ARTWORK TOP" at 20585,15905 h100
  text "CORE" at 23085,15900 h30
  text "34.1MIL" at 23585,15895 h30
  text "FR-4" at 22733,15892 h30
  text "COPPER" at 22735,15820 h30
  text "ARTW02" at 23080,15820 h30
  text "2.1MIL" at 23590,15820 h30
  text "2--ARTWORK BOTTOM" at 20575,15350 h100
  text "Notes:" at 21430,14532 h62.99
  text "1.Drill Tolerance +/-1.95mil[+/-0.05mm] for connector 24mil hole" at 21430,14282 h62.99
  text "2.Filled the via under BGA with bule_oil except test via" at 21430,14182 h62.99
PEN3:
  lines w1: 21875.85,26205.89 21876.85,26205.89
ASSEMBLY_DETAIL:
  circle w1: c23858.23,23070.83 r49.21
  circle w1: c23858.23,21417.28 r49.21
  circle w1: c21810.98,21417.28 r49.21
  circle w1: c21810.98,23070.83 r49.21
  circle w1: c22834.61,23055.08 r31.5
  circle w1: c22834.61,21433.03 r31.5
  circle w1: c23842.48,22244.06 r31.5
  circle w1: c21826.73,22244.06 r31.5
  lines w1: 21826.73,21791.3 21826.73,22696.81 ; 22381.85,21433.03 23287.36,21433.03 ; 22381.85,23055.08 23287.36,23055.08 ; 22834.61,23228.31 22834.61,21259.8 22834.61,21338.54 ; 23842.48,21791.3 23842.48,22696.81 ; 24015.71,22244.06 21653.5,22244.06 21732.24,22244.06 ; 21732.24,22244.06 21732.24,21791.3 21921.22,21791.3 21921.22,22696.81 21732.24,22696.81 21732.24,22244.06 ; 22834.61,21338.54 22849.52,21338.54 23287.36,21338.54 23287.36,21527.52 22381.85,21527.52 22381.85,21338.54 22834.61,21338.54 ; 21653.5,21259.8 21653.5,23228.31 24015.71,23228.31 24015.71,21259.8 21653.5,21259.8 ; 22381.85,22960.59 23287.36,22960.59 23287.36,23149.57 22849.52,23149.57 22834.61,23149.57 22381.85,23149.57 22381.85,22960.59 ; 23747.99,21791.3 23936.97,21791.3 23936.97,22244.06 23936.97,22696.81 23747.99,22696.81 23747.99,21791.3
DRAWING_ORIGIN:
  lines w1: 24636.08,27173.41 24686.08,27173.41 ; 24661.08,27148.41 24661.08,27198.41

## Text inside footprints (layer, text, board x,y; h text height)
C1: PIN_NUMBER "1" at 23491.08,26833.41 h25 r90; PIN_NUMBER "2" at 23491.08,26903.41 h25 r90
C2: PIN_NUMBER "2" at 23421.08,26841.91 h25 r270; PIN_NUMBER "1" at 23421.08,26874.91 h25 r270
C3: PIN_NUMBER "2" at 23687.58,27153.41 h25; PIN_NUMBER "1" at 23654.58,27153.41 h25
C5: PIN_NUMBER "2" at 20871.08,26508.41 h25; PIN_NUMBER "1" at 20801.08,26508.41 h25
C6: PIN_NUMBER "2" at 21336.08,26443.41 h25 r90; PIN_NUMBER "1" at 21336.08,26373.41 h25 r90
C7: PIN_NUMBER "2" at 21416.08,26414.91 h25 r90; PIN_NUMBER "1" at 21416.08,26381.91 h25 r90
C8: PIN_NUMBER "2" at 20856.08,25833.41 h25; PIN_NUMBER "1" at 20786.08,25833.41 h25
C9: PIN_NUMBER "2" at 21356.08,25723.41 h25 r90; PIN_NUMBER "1" at 21356.08,25653.41 h25 r90
C10: PIN_NUMBER "2" at 21426.08,25689.91 h25 r90; PIN_NUMBER "1" at 21426.08,25656.91 h25 r90
C11: PIN_NUMBER "1" at 21471.08,26738.41 h25; PIN_NUMBER "2" at 21541.08,26738.41 h25
C12: PIN_NUMBER "1" at 21489.58,26803.41 h25; PIN_NUMBER "2" at 21522.58,26803.41 h25
C13: PIN_NUMBER "1" at 21489.58,26858.41 h25; PIN_NUMBER "2" at 21522.58,26858.41 h25
C14: PIN_NUMBER "1" at 22901.08,26833.41 h25 r270; PIN_NUMBER "2" at 22901.08,26763.41 h25 r270
C15: PIN_NUMBER "1" at 23021.08,26839.91 h25 r270; PIN_NUMBER "2" at 23021.08,26806.91 h25 r270
C16: PIN_NUMBER "1" at 22966.08,26839.91 h25 r270; PIN_NUMBER "2" at 22966.08,26806.91 h25 r270
C17: PIN_NUMBER "1" at 24237.58,25273.41 h25 r180; PIN_NUMBER "2" at 24204.58,25273.41 h25 r180
C18: PIN_NUMBER "1" at 21441.08,25951.91 h25 r90; PIN_NUMBER "2" at 21441.08,25984.91 h25 r90
C19: PIN_NUMBER "1" at 22166.08,25946.91 h25 r90; PIN_NUMBER "2" at 22166.08,25979.91 h25 r90
C20: PIN_NUMBER "1" at 22166.08,25574.91 h25 r270; PIN_NUMBER "2" at 22166.08,25541.91 h25 r270
C21: PIN_NUMBER "1" at 21501.08,25754.91 h25 r270; PIN_NUMBER "2" at 21501.08,25721.91 h25 r270
C22: PIN_NUMBER "2" at 22870.08,25952.91 h25 r270; PIN_NUMBER "1" at 22870.08,25985.91 h25 r270
C23: PIN_NUMBER "2" at 22539.58,26125.41 h25; PIN_NUMBER "1" at 22506.58,26125.41 h25
CON1: PIN_NUMBER "35" at 22479.51,26553.41 h25; PIN_NUMBER "31" at 22400.78,26553.41 h25; PIN_NUMBER "30" at 22381.09,26553.41 h25; PIN_NUMBER "22" at 22223.61,26553.41 h25; PIN_NUMBER "28" at 22341.72,26553.41 h25; PIN_NUMBER "9" at 21977.7,26553.41 h25; PIN_NUMBER "16" at 22105.5,26553.41 h25; PIN_NUMBER "12" at 22026.76,26553.41 h25; PIN_NUMBER "23" at 22243.29,26553.41 h25; PIN_NUMBER "17" at 22125.18,26553.41 h25; PIN_NUMBER "10" at 21987.39,26553.41 h25; PIN_NUMBER "13" at 22046.44,26553.41 h25; PIN_NUMBER "8" at 21958.02,26553.41 h25; PIN_NUMBER "24" at 22262.98,26553.41 h25; PIN_NUMBER "18" at 22144.87,26553.41 h25; PIN_NUMBER "21" at 22203.92,26553.41 h25; PIN_NUMBER "7" at 21938.33,26553.41 h25; PIN_NUMBER "14" at 22066.13,26553.41 h25; PIN_NUMBER "15" at 22085.81,26553.41 h25; PIN_NUMBER "19" at 22164.55,26553.41 h25; PIN_NUMBER "25" at 22282.67,26553.41 h25; PIN_NUMBER "26" at 22302.35,26553.41 h25; PIN_NUMBER "37" at 22518.88,26553.41 h25; PIN_NUMBER "5" at 21898.96,26553.41 h25; PIN_NUMBER "4" at 21879.28,26553.41 h25; PIN_NUMBER "1" at 21820.22,26553.41 h25; PIN_NUMBER "2" at 21839.91,26553.41 h25; PIN_NUMBER "3" at 21859.59,26553.41 h25; PIN_NUMBER "27" at 22322.03,26553.41 h25; PIN_NUMBER "29" at 22361.4,26553.41 h25; PIN_NUMBER "32" at 22420.46,26553.41 h25; PIN_NUMBER "6" at 21918.65,26553.41 h25; PIN_NUMBER "11" at 22007.07,26553.41 h25; PIN_NUMBER "20" at 22184.24,26553.41 h25; PIN_NUMBER "38" at 22538.57,26553.41 h25; PIN_NUMBER "40" at 22577.94,26553.41 h25; PIN_NUMBER "39" at 22558.26,26553.41 h25; PIN_NUMBER "41" at 21715.8,26659.71 h20; PIN_NUMBER "42" at 22680.37,26659.71 h20; PIN_NUMBER "34" at 22459.83,26553.41 h25; PIN_NUMBER "33" at 22440.15,26553.41 h25; PIN_NUMBER "36" at 22499.2,26553.41 h25
CON2: PIN_NUMBER "36" at 23223.61,26022.41 h25 r180; PIN_NUMBER "35" at 23243.29,26022.41 h25 r180; PIN_NUMBER "3" at 23883.21,26022.41 h25 r180; PIN_NUMBER "37" at 23203.92,26022.41 h25 r180; PIN_NUMBER "40" at 23144.87,26022.41 h25 r180; PIN_NUMBER "38" at 23184.24,26022.41 h25 r180; PIN_NUMBER "39" at 23164.55,26022.41 h25 r180; PIN_NUMBER "2" at 23902.9,26022.41 h25 r180; PIN_NUMBER "1" at 23922.58,26022.41 h25 r180; PIN_NUMBER "31" at 23322.03,26022.41 h25 r180; PIN_NUMBER "16" at 23617.31,26022.41 h25 r180; PIN_NUMBER "18" at 23577.94,26022.41 h25 r180; PIN_NUMBER "28" at 23381.09,26022.41 h25 r180; PIN_NUMBER "33" at 23282.66,26022.41 h25 r180; PIN_NUMBER "12" at 23696.05,26022.41 h25 r180; PIN_NUMBER "30" at 23341.72,26022.41 h25 r180; PIN_NUMBER "26" at 23420.46,26022.41 h25 r180; PIN_NUMBER "21" at 23518.88,26022.41 h25 r180; PIN_NUMBER "24" at 23459.83,26022.41 h25 r180; PIN_NUMBER "22" at 23499.2,26022.41 h25 r180; PIN_NUMBER "23" at 23479.51,26022.41 h25 r180; PIN_NUMBER "9" at 23765.1,26022.41 h25 r180; PIN_NUMBER "17" at 23597.62,26022.41 h25 r180; PIN_NUMBER "19" at 23558.25,26022.41 h25 r180; PIN_NUMBER "10" at 23735.42,26022.41 h25 r180; PIN_NUMBER "32" at 23302.35,26022.41 h25 r180; PIN_NUMBER "25" at 23440.14,26022.41 h25 r180; PIN_NUMBER "34" at 23262.98,26022.41 h25 r180; PIN_NUMBER "20" at 23538.57,26022.41 h25 r180; PIN_NUMBER "11" at 23715.73,26022.41 h25 r180; PIN_NUMBER "27" at 23400.77,26022.41 h25 r180; PIN_NUMBER "13" at 23676.36,26022.41 h25 r180; PIN_NUMBER "15" at 23636.99,26022.41 h25 r180; PIN_NUMBER "14" at 23656.68,26022.41 h25 r180; PIN_NUMBER "5" at 23843.84,26022.41 h25 r180; PIN_NUMBER "8" at 23784.79,26022.41 h25 r180; PIN_NUMBER "6" at 23824.16,26022.41 h25 r180; PIN_NUMBER "7" at 23804.47,26022.41 h25 r180; PIN_NUMBER "4" at 23863.53,26022.41 h25 r180; PIN_NUMBER "42" at 23050.44,25916.11 h20 r180; PIN_NUMBER "41" at 24015.01,25916.11 h20 r180; PIN_NUMBER "29" at 23361.4,26022.41 h25 r180
D1: PIN_NUMBER "2" at 23670.59,27058.41 h25; PIN_NUMBER "1" at 23806.57,27058.41 h25
D2: PIN_NUMBER "2" at 24499.68,25115.97 h16 r90; PIN_NUMBER "1" at 24499.68,25060.85 h16 r90
D3: PIN_NUMBER "2" at 24369.68,25115.97 h16 r90; PIN_NUMBER "1" at 24369.68,25060.85 h16 r90
D4: PIN_NUMBER "2" at 24434.68,25115.97 h16 r90; PIN_NUMBER "1" at 24434.68,25060.85 h16 r90
D5: PIN_NUMBER "2" at 24309.68,25115.97 h16 r90; PIN_NUMBER "1" at 24309.68,25060.85 h16 r90
H1: PIN_NUMBER "1" at 20635.33,27173.41 h25
H2: PIN_NUMBER "1" at 24651.08,24223.41 h25
H3: PIN_NUMBER "1" at 24651.08,27173.41 h25
H4: PIN_NUMBER "1" at 20635.33,24223.41 h25
L1: PIN_NUMBER "2" at 23755.14,26673.41 h25; PIN_NUMBER "1" at 23637.03,26673.41 h25; DIMENSION_KEEPOUT "[s1.4x3.8]" at 23596.08,26524.67 h25
L2: PIN_NUMBER "2" at 21240.14,26418.41 h25; PIN_NUMBER "1" at 21122.03,26418.41 h25; DIMENSION_KEEPOUT "[s1.4x3.8]" at 21081.08,26269.67 h25
L3: PIN_NUMBER "1" at 21142.03,25703.41 h25; PIN_NUMBER "2" at 21260.14,25703.41 h25; DIMENSION_KEEPOUT "[s1.4x3.8]" at 21101.08,25554.67 h25
Q1: PIN_NUMBER "1" at 21154.58,26075.66 h25; PIN_NUMBER "3" at 21116.58,25983.16 h25; PIN_NUMBER "2" at 21079.58,26075.66 h25
R1: PIN_NUMBER "1" at 23919.58,26908.41 h25; PIN_NUMBER "2" at 23952.58,26908.41 h25
R3: PIN_NUMBER "1" at 20952.58,26133.41 h25 r180; PIN_NUMBER "2" at 20919.58,26133.41 h25 r180
R8: PIN_NUMBER "1" at 20919.58,26193.41 h25; PIN_NUMBER "2" at 20952.58,26193.41 h25
R9: PIN_NUMBER "2" at 20909.58,25413.41 h25 r180; PIN_NUMBER "1" at 20942.58,25413.41 h25 r180
R10: PIN_NUMBER "1" at 20909.58,25473.41 h25; PIN_NUMBER "2" at 20942.58,25473.41 h25
R11: PIN_NUMBER "1" at 24436.08,25691.91 h25 r90; PIN_NUMBER "2" at 24436.08,25724.91 h25 r90
R12: PIN_NUMBER "1" at 24381.08,25691.91 h25 r90; PIN_NUMBER "2" at 24381.08,25724.91 h25 r90
R13: PIN_NUMBER "2" at 24559.08,25722.91 h25 r90; PIN_NUMBER "1" at 24559.08,25689.91 h25 r90
R15: PIN_NUMBER "1" at 21154.58,26263.41 h25; PIN_NUMBER "2" at 21187.58,26263.41 h25
R16: PIN_NUMBER "1" at 21182.58,25528.41 h25 r180; PIN_NUMBER "2" at 21149.58,25528.41 h25 r180
R17: PIN_NUMBER "1" at 23761.08,26241.91 h25 r90; PIN_NUMBER "2" at 23761.08,26274.91 h25 r90
R18: PIN_NUMBER "1" at 23261.08,26281.91 h25 r90; PIN_NUMBER "2" at 23261.08,26314.91 h25 r90
R19: PIN_NUMBER "1" at 23206.08,26281.91 h25 r90; PIN_NUMBER "2" at 23206.08,26314.91 h25 r90
R20: PIN_NUMBER "1" at 21496.08,25951.91 h25 r90; PIN_NUMBER "2" at 21496.08,25984.91 h25 r90
R21: PIN_NUMBER "2" at 22216.08,25541.91 h25 r270; PIN_NUMBER "1" at 22216.08,25574.91 h25 r270
R22: PIN_NUMBER "2" at 22216.08,25951.91 h25 r270; PIN_NUMBER "1" at 22216.08,25984.91 h25 r270
R23: PIN_NUMBER "2" at 22816.08,25664.91 h25 r90; PIN_NUMBER "1" at 22816.08,25631.91 h25 r90
R24: PIN_NUMBER "2" at 22111.08,25574.91 h25 r90; PIN_NUMBER "1" at 22111.08,25541.91 h25 r90
R25: PIN_NUMBER "1" at 22816.08,25956.91 h25 r90; PIN_NUMBER "2" at 22816.08,25989.91 h25 r90
R26: PIN_NUMBER "1" at 22116.08,25951.91 h25 r90; PIN_NUMBER "2" at 22116.08,25984.91 h25 r90
R27: PIN_NUMBER "2" at 21241.58,25990.41 h25 r180; PIN_NUMBER "1" at 21274.58,25990.41 h25 r180
R28: PIN_NUMBER "1" at 21240.58,26042.41 h25; PIN_NUMBER "2" at 21273.58,26042.41 h25
R29: PIN_NUMBER "1" at 21240.58,26094.41 h25; PIN_NUMBER "2" at 21273.58,26094.41 h25
TP1: PIN_NUMBER "1" at 24286.08,25633.41 h25
U1: PIN_NUMBER "5" at 23646.48,26878.41 h15.75 r90; PIN_NUMBER "3" at 23733.08,26915.81 h15.75 r90; PIN_NUMBER "1" at 23733.08,26841.01 h15.75 r90; PIN_NUMBER "4" at 23646.48,26915.81 h15.75 r90; PIN_NUMBER "6" at 23646.48,26841.01 h15.75 r90; PIN_NUMBER "2" at 23733.08,26878.41 h15.75 r90; ASSEMBLY_TOP "pn" at 23691.38,26878.41 h15.75 r90; ASSEMBLY_TOP "RichardLC" at 23647.29,26878.41 h15.75 r90
U3: PIN_NUMBER "5" at 20875.08,26306.41 h25 r90; PIN_NUMBER "3" at 20977.08,26380.41 h25 r90; PIN_NUMBER "1" at 20977.08,26306.41 h25 r90; PIN_NUMBER "4" at 20875.08,26380.41 h25 r90; PIN_NUMBER "2" at 20977.08,26343.41 h25 r90
U4: PIN_NUMBER "3" at 20967.08,25685.41 h25 r90; PIN_NUMBER "5" at 20865.08,25611.41 h25 r90; PIN_NUMBER "1" at 20967.08,25611.41 h25 r90; PIN_NUMBER "4" at 20865.08,25685.41 h25 r90; PIN_NUMBER "2" at 20967.08,25648.41 h25 r90
U5: PIN_NUMBER "1" at 24354.28,25278.41 h25 r90; PIN_NUMBER "4" at 24431.08,25278.41 h25 r90; PIN_NUMBER "3" at 24405.48,25278.41 h25 r90; PIN_NUMBER "5" at 24456.68,25278.41 h25 r90; PIN_NUMBER "13" at 24421.08,25508.41 h25 r90; PIN_NUMBER "14" at 24395.48,25508.41 h25 r90; PIN_NUMBER "16" at 24344.28,25508.41 h25 r90; PIN_NUMBER "2" at 24379.88,25278.41 h25 r90; PIN_NUMBER "6" at 24482.28,25278.41 h25 r90; PIN_NUMBER "12" at 24446.68,25508.41 h25 r90; PIN_NUMBER "11" at 24472.28,25508.41 h25 r90; PIN_NUMBER "10" at 24497.88,25508.41 h25 r90; PIN_NUMBER "8" at 24533.48,25278.41 h25 r90; PIN_NUMBER "7" at 24507.88,25278.41 h25 r90; PIN_NUMBER "15" at 24369.88,25508.41 h25 r90; PIN_NUMBER "9" at 24533.48,25508.41 h25 r90
U6: PIN_NUMBER "1" at 21594.7,25655.76 h25; PIN_NUMBER "42" at 21702.81,25951.05 h25; PIN_NUMBER "31" at 21919.35,25951.05 h25; PIN_NUMBER "25" at 22037.46,25951.05 h25; PIN_NUMBER "44" at 21663.44,25951.05 h25; PIN_NUMBER "48" at 21584.7,25951.05 h25; PIN_NUMBER "29" at 21958.72,25951.05 h25; PIN_NUMBER "37" at 21801.24,25951.05 h25; PIN_NUMBER "32" at 21899.66,25951.05 h25; PIN_NUMBER "46" at 21624.07,25951.05 h25; PIN_NUMBER "38" at 21781.55,25951.05 h25; PIN_NUMBER "30" at 21939.03,25951.05 h25; PIN_NUMBER "33" at 21879.98,25951.05 h25; PIN_NUMBER "27" at 21998.09,25951.05 h25; PIN_NUMBER "47" at 21604.39,25951.05 h25; PIN_NUMBER "40" at 21742.18,25951.05 h25; PIN_NUMBER "43" at 21683.13,25951.05 h25; PIN_NUMBER "26" at 22017.77,25951.05 h25; PIN_NUMBER "35" at 21840.61,25951.05 h25; PIN_NUMBER "36" at 21820.92,25951.05 h25; PIN_NUMBER "24" at 22037.46,25655.76 h25; PIN_NUMBER "41" at 21722.5,25951.05 h25; PIN_NUMBER "11" at 21781.55,25655.76 h25; PIN_NUMBER "13" at 21820.92,25655.76 h25; PIN_NUMBER "8" at 21732.5,25655.76 h25; PIN_NUMBER "23" at 22017.77,25655.76 h25; PIN_NUMBER "5" at 21673.44,25655.76 h25; PIN_NUMBER "2" at 21614.39,25655.76 h25; PIN_NUMBER "19" at 21939.03,25655.76 h25; PIN_NUMBER "12" at 21801.24,25655.76 h25; PIN_NUMBER "14" at 21840.61,25655.76 h25; PIN_NUMBER "20" at 21958.72,25655.76 h25; PIN_NUMBER "3" at 21634.07,25655.76 h25; PIN_NUMBER "16" at 21879.98,25655.76 h25; PIN_NUMBER "22" at 21998.09,25655.76 h25; PIN_NUMBER "6" at 21693.13,25655.76 h25; PIN_NUMBER "9" at 21752.18,25655.76 h25; PIN_NUMBER "17" at 21899.66,25655.76 h25; PIN_NUMBER "7" at 21712.81,25655.76 h25; PIN_NUMBER "18" at 21919.35,25655.76 h25; PIN_NUMBER "4" at 21653.76,25655.76 h25; PIN_NUMBER "10" at 21761.87,25655.76 h25; PIN_NUMBER "15" at 21860.29,25655.76 h25; PIN_NUMBER "21" at 21978.4,25655.76 h25; PIN_NUMBER "45" at 21643.76,25951.05 h25; PIN_NUMBER "39" at 21761.87,25951.05 h25; PIN_NUMBER "34" at 21860.29,25951.05 h25; PIN_NUMBER "28" at 21978.4,25951.05 h25; ASSEMBLY_TOP "TSSOP_48" at 21668.28,26200.93 h50
U7: PIN_NUMBER "41" at 22402.5,25956.05 h25; PIN_NUMBER "8" at 22412.5,25660.76 h25; PIN_NUMBER "31" at 22599.35,25956.05 h25; PIN_NUMBER "42" at 22382.81,25956.05 h25; PIN_NUMBER "46" at 22304.07,25956.05 h25; PIN_NUMBER "32" at 22579.66,25956.05 h25; PIN_NUMBER "30" at 22619.03,25956.05 h25; PIN_NUMBER "48" at 22264.7,25956.05 h25; PIN_NUMBER "25" at 22717.46,25956.05 h25; PIN_NUMBER "29" at 22638.72,25956.05 h25; PIN_NUMBER "1" at 22274.7,25660.76 h25; PIN_NUMBER "24" at 22717.46,25660.76 h25; PIN_NUMBER "26" at 22697.77,25956.05 h25; PIN_NUMBER "27" at 22678.09,25956.05 h25; PIN_NUMBER "3" at 22314.07,25660.76 h25; PIN_NUMBER "22" at 22678.09,25660.76 h25; PIN_NUMBER "20" at 22638.72,25660.76 h25; PIN_NUMBER "19" at 22619.03,25660.76 h25; PIN_NUMBER "23" at 22697.77,25660.76 h25; PIN_NUMBER "7" at 22392.81,25660.76 h25; PIN_NUMBER "18" at 22599.35,25660.76 h25; PIN_NUMBER "17" at 22579.66,25660.76 h25; PIN_NUMBER "4" at 22333.76,25660.76 h25; PIN_NUMBER "10" at 22441.87,25660.76 h25; PIN_NUMBER "15" at 22540.29,25660.76 h25; PIN_NUMBER "21" at 22658.4,25660.76 h25; PIN_NUMBER "28" at 22658.4,25956.05 h25; PIN_NUMBER "45" at 22323.76,25956.05 h25; PIN_NUMBER "39" at 22441.87,25956.05 h25; PIN_NUMBER "34" at 22540.29,25956.05 h25; PIN_NUMBER "16" at 22559.98,25660.76 h25; PIN_NUMBER "14" at 22520.61,25660.76 h25; PIN_NUMBER "13" at 22500.92,25660.76 h25; PIN_NUMBER "33" at 22559.98,25956.05 h25; PIN_NUMBER "35" at 22520.61,25956.05 h25; PIN_NUMBER "36" at 22500.92,25956.05 h25; PIN_NUMBER "12" at 22481.24,25660.76 h25; PIN_NUMBER "11" at 22461.55,25660.76 h25; PIN_NUMBER "9" at 22432.18,25660.76 h25; PIN_NUMBER "6" at 22373.13,25660.76 h25; PIN_NUMBER "5" at 22353.44,25660.76 h25; PIN_NUMBER "2" at 22294.39,25660.76 h25; PIN_NUMBER "37" at 22481.24,25956.05 h25; PIN_NUMBER "38" at 22461.55,25956.05 h25; PIN_NUMBER "40" at 22422.18,25956.05 h25; PIN_NUMBER "43" at 22363.13,25956.05 h25; PIN_NUMBER "44" at 22343.44,25956.05 h25; PIN_NUMBER "47" at 22284.39,25956.05 h25; ASSEMBLY_TOP "TSSOP_48" at 22348.28,26205.93 h50